# EAGLE board ventmon_t0.5 (EAGLE 9.6.2)
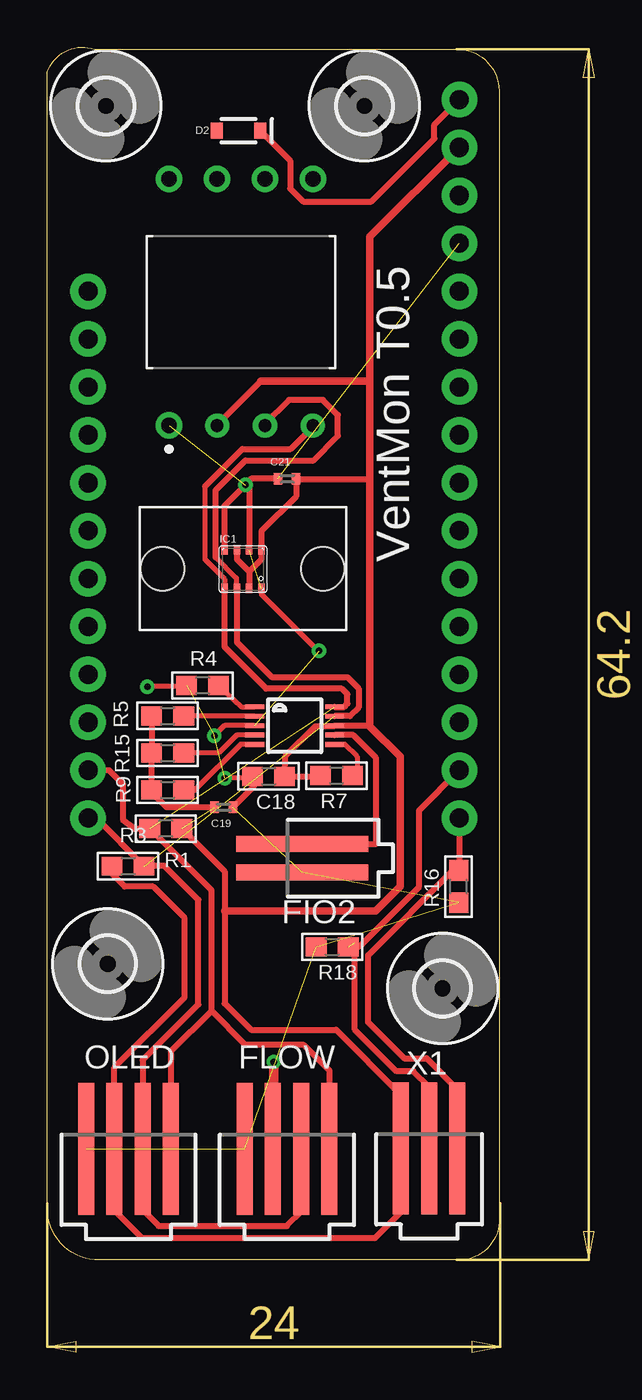
[diagram p0: board, top side]
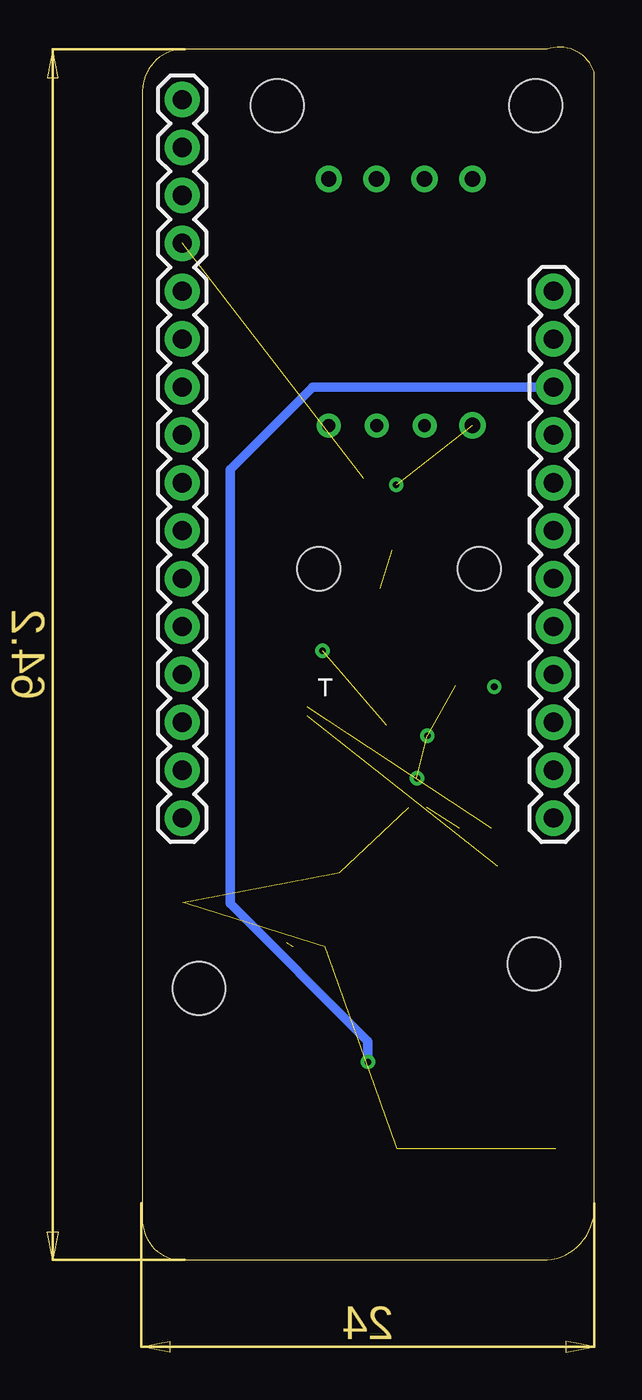
[diagram p1: board, bottom side, seen from below]

Size 23.96 x 64.31 mm. Coordinates in mm from the lower left corner, seen from the top.
Outline: 0.01,3 0.01,63 arc-90 2.51,64.2 21.71,64.2 arc-90 23.96,62 23.96,2 arc-90 21.71,0 2.51,0 arc-90 0.01,3
Copper layers (1*16): Top 0.035mm / dielectric 1.5mm / Bottom 0.035mm
Design rules "default *": minimum track width 6mil, minimum drill 10mil, track to track 6mil, track to pad 6mil, pad to pad 6mil, via to via 6mil, smd to smd 6mil, copper to edge 40mil, drill to drill 6mil, minimum pad ring 10mil, minimum via ring 8mil, stop-mask expansion 4mil, vias tented up to drill 0.35mm, thermal gap 10mil

## Footprints (pad centres in the part's own frame; a part is rotated, then mirrored left to right if it is on the bottom)
0603 = smd 1.1 x 1: 1 -0.85,0; 2 0.85,0
C0402_B = smd 0.457 x 0.61: 1 -0.483,0; 2 0.483,0
SOD-323 = smd 0.63 x 0.83: A 1.15,0; C -1.15,0
87438-02 = smd 7 x 0.85: 1 0,0.75; 2 0,-0.75
87438-04 = smd 7 x 0.85: 1 0,2.25; 2 0,0.75; 3 0,-0.75; 4 0,-2.25
2,8 = hole 2.8: 0,0
BME280-HAT = smd 0.35 x 0.5: 1 2.245,-2.295; 2 1.595,-2.295; 3 0.945,-2.295; 4 0.295,-2.295; 5 0.295,-0.245; 6 0.945,-0.245; 7 1.595,-0.245; 8 2.245,-0.245 | hole 2.3: 5.5,-1.25; -3,-1.25
1X16 = drill 1.016 pad 1.88: 1 0,0; 2 2.54,0; 3 5.08,0; 4 7.62,0; 5 10.16,0; 6 12.7,0; 7 15.24,0; 8 17.78,0; 9 20.32,0; 10 22.86,0; 11 25.4,0; 12 27.94,0; 13 30.48,0; 14 33.02,0; 15 35.56,0; 16 38.1,0
1X12 = drill 1.016 pad 1.88: 1 0,0; 2 2.54,0; 3 5.08,0; 4 7.62,0; 5 10.16,0; 6 12.7,0; 7 15.24,0; 8 17.78,0; 9 20.32,0; 10 22.86,0; 11 25.4,0; 12 27.94,0
DIP1330W46P254L1000H616Q8B = drill 0.813 pad 1.397: 1 -6.54,3.81; 5 6.54,-3.81; 6 6.54,-1.27; 7 6.54,1.27; 8 6.54,3.81 | drill 0.675 pad 1.275: 2 -6.54,1.27; 3 -6.54,-1.27; 4 -6.54,-3.81
MSOP10 = smd 0.25 x 1: 1 -1,-2.113; 2 -0.5,-2.113; 3 0,-2.113; 4 0.5,-2.113; 5 1,-2.113; 6 1,2.113; 7 0.5,2.113; 8 0,2.113; 9 -0.5,2.113; 10 -1,2.113
87438-03 = smd 7 x 0.85: 1 0,1.5; 2 0,0; 3 0,-1.5

## Placement (x,y rotation side)
C18  1µF  [0603]  11.74,25.65 0 top
C19  0.1uF  [C0402_B]  9.36,24 180 top
C21  0.1uF  [C0402_B]  12.71,41.42 0 top
D2  250mA/100V  [SOD-323]  10.15,59.88 180 top
FIO2  87438-02  [87438-02]  13.51,21.3 180 top
FLOW  87438-04  [87438-04]  12.71,5.9 90 top
H1  MOUNT-HOLE2.8  [2,8]  16.81,61.2 0 top
H2  MOUNT-HOLE2.8  [2,8]  20.96,14.4 0 top
H3  MOUNT-HOLE2.8  [2,8]  3.21,15.7 0 top
H4  MOUNT-HOLE2.8  [2,8]  3.11,61.2 0 top
IC1  BME280BM280-HAT  [BME280-HAT]  9.11,37.9 0 top
J6  Header-16  [1X16]  21.85,61.53 270 bottom
J7  Header-12  [1X12]  2.17,51.37 270 bottom
OLED  87438-04  [87438-04]  4.31,5.9 90 top
PRESSURE1  HSCDRRT001PD2A3  [DIP1330W46P254L1000H616Q8B]  10.28,50.79 90 top
R1  4.7K  [0603]  6.29,22.88 180 top
R3  4.7K  [0603]  4.29,20.88 0 top
R4  10K  [0603]  8.24,30.46 180 top
R5  10K  [0603]  6.39,28.85 0 top
R7  10K  [0603]  15.34,25.69 0 top
R9  10K  [0603]  6.39,24.92 0 top
R15  10K  [0603]  6.39,26.89 0 top
R16  10K  [0603]  21.81,19.8 90 top
R18  10K  [0603]  15.11,16.6 0 top
U2  ADS1115IDGST  [MSOP10]  13.12,28.34 270 top
X1  87438-03  [87438-03]  20.25,5.93 90 top

## Library data of the parts
C18 R1 R3-R5 R7 R9 R15 R16 R18 U2 = microbuilder
C19 C21 = Particle
D2 = SparkFun-DiscreteSemi; PROD_ID: DIO-09646
FIO2 = con-molex; MF: MOLEX; OC_FARNELL: 1711327; OC_NEWARK: unknown
FLOW OLED = con-molex; MF: MOLEX; OC_FARNELL: unknown; OC_NEWARK: unknown
H1 = holes; SPICEPREFIX: X
H2-H4 = holes
IC1 = bosch-bme280
J6 J7 = SparkFun-Connectors
PRESSURE1 = HSCDRRT001PD2A3
X1 = con-molex; MF: MOLEX; OC_FARNELL: 1711328; OC_NEWARK: unknown

## Nets
!RESET: D2.A
+3V3: C18.2 C19.2 C21.2 IC1.2 IC1.6 IC1.8 J6.2 OLED.2 PRESSURE1.2 R1.1 R3.1 R5.1 R7.1 R9.1 R15.1 U2.8 X1.1
+5V: FLOW.2 J7.3
ADDR: R4.1 U2.1
ALERT: R5.2 U2.2
BTNA: J6.16 R16.2 X1.3
BTNB: J6.15 R18.2 X1.2
FIO2: FIO2.2 U2.7
GND: C18.1 C19.1 C21.1 FIO2.1 FLOW.1 IC1.1 IC1.5 IC1.7 J6.4 OLED.1 PRESSURE1.1 R4.2 R16.1 R18.1 U2.3
MISO: J6.13
MOSI: J6.12
N$4: D2.C J6.1
N$24: J7.7
N$25: J7.8
N$26: J7.9
N$38: R7.2 U2.6
N$40: R9.2 U2.5
N$45: R15.2 U2.4
SCL: FLOW.4 IC1.4 J7.11 OLED.4 PRESSURE1.4 R1.2 U2.10
SCLK: J6.11
SDA: FLOW.3 IC1.3 J7.12 OLED.3 PRESSURE1.3 R3.2 U2.9

## Tracks (layer width: path | path; a pad name or v marks a point on that pad's centre or on a via)
+3V3  (1 unrouted)
  Top 0.2: 10.71,36.5
  Top 0.305: IC1.6 10.06,37.16 10.71,36.5 11.36,37.15 IC1.8 11.36,38.65 13.19,40.48 C21.2 | 10.71,36.5 IC1.2 10.71,35.66 | R7.1 14.46,25.65 C18.2 12.63,26.72 14.21,28.3 15.2,28.3 U2.8 17.11,28.34 | 5.44,24.98 5.51,24.95 R9.1 | X1.1 18.75,2.54 17.38,1.17 5.01,1.17 3.56,2.62 OLED.2 3.56,10.2 7.29,13.93 7.29,18.13 5.61,19.8 4.11,19.8 3.44,20.48 R3.1 | X1.1 18.75,9.23 | X1.1 18.75,8.77 15.31,12.2 10.81,12.2 9.41,13.6 9.41,18.5 9.41,20.6 R1.1 6.94,23.18 | 13.19,41.52 C21.2 | C21.2 13.21,41.4 17.11,41.4 | 11.31,46.6 9.01,44.3 PRESSURE1.2 | R9.1 5.61,24.85 | R9.1 R15.1 R5.1 | R9.1 5.54,24.8 6.34,24 C19.2
  Top 0.406: 5.23,24.92 R9.1 | 9.41,18.5 17.41,18.5 18.71,19.8 18.71,26.7 17.11,28.3 17.11,28.34 17.11,41.4 17.11,46.6 | J6.2 17.11,54.25 17.11,46.6 | 11.31,46.6 17.11,46.6
+5V  (via drill 0.35)
  Top 0.508: v12.01,10.5 12.01,5.95 FLOW.2
  Bottom 0.508: J7.3 14.92,46.29 19.31,41.9 19.31,18.9 12.01,11.6 v12.01,10.5 12.01,10.4
ADDR
  Top 0.254: R4.1 10.31,29.34 U2.1
ALERT
  Top 0.254: U2.2 7.32,28.84 R5.2
BTNA
  Top 0.305: X1.3 21.75,9.06 20.11,10.69 18.92,10.69 17.01,12.6 17.01,16.15 21.51,20.65 R16.2 21.85,20.69 J6.16
BTNB  (1 unrouted)
  Top 0.305: X1.2 20.25,9.17 19.41,10 18.51,10 16.31,12.2 16.31,16.6 R18.2 16.53,16.6 19.71,19.78 19.71,23.83 J6.15 | 16.31,16.8 16.21,16.9
FIO2
  Top 0.305: FIO2.2 17.41,22.05 17.41,26.65 16.23,27.84 U2.7
GND  (via drill 0.35)  (11 unrouted)
  Top 0.254: 10.81,41.42 10.81,41.4 v10.51,41.1 10.71,41.3 | IC1.1 11.36,35.31 14.36,32.3 v14.41,32.3 | R4.2 7.23,30.4 v5.31,30.4 | C18.1 10.88,25.55 v9.41,25.55 | U2.3 9.4,28.34 v8.86,27.8
  Top 0.305: C21.1 10.81,41.42 | 10.71,41.3 IC1.7 | IC1.5 9.41,40 v10.51,41.1 | C18.1 10.94,25.7 10.94,25.1 C19.1
MISO
  Top 0.203: 21.75,31.15 J6.13
N$4
  Top 0.305: J6.1 20.52,60.2 20.52,59.47 17.18,56.13 13.57,56.13 12.88,56.82 12.88,58.29 D2.C
N$38
  Top 0.254: U2.6 15.78,27.34 16.43,26.69 16.43,25.9 R7.2
N$40
  Top 0.254: U2.5 10.25,27.34 7.84,24.92 R9.2
N$45
  Top 0.254: R15.2 9.1,26.89 10.05,27.84 U2.4
SCL  (1 unrouted)
  Top 0.254: IC1.4 9.41,36.11 8.38,37.14 8.38,41.04
  Top 0.305: FLOW.4 14.96,10.05 13.61,11.4 10.51,11.4 8.71,13.2 | J7.11 3.27,25.97 4.01,25.23 4.01,23.34 4.61,22.88 R1.2 8.71,19.6 8.71,13.2 | U2.10 15.75,29.34 15.91,29.5 15.91,30 15.61,30.3 11.61,30.3 9.41,32.51 IC1.4 | 8.38,41.04 10.34,43 12.91,43 14.09,44.18 PRESSURE1.4 | 8.71,13.2 6.56,11.05 OLED.4
  Bottom 0.152: J7.11
SDA  (1 unrouted)
  Top 0.2: 10.03,35.63 IC1.3 | 5.01,4.6 5.01,4.8 5.06,4.85 5.06,5.4
  Top 0.254: 10.03,35.63 10.03,36.16 8.93,37.27
  Top 0.305: OLED.3 5.06,5.4 | FLOW.3 13.51,5.85 13.51,2.6 12.71,1.8 5.91,1.8 5.11,2.6 5.11,5.85 OLED.3 | 8.93,37.27 8.93,37.28 8.93,40.82 10.51,42.4 14.11,42.4 15.41,43.7 15.41,44.8 14.61,45.6 12.81,45.6 11.55,44.34 PRESSURE1.3 | IC1.3 10.06,32.76 11.91,30.9 15.91,30.9 16.51,30.3 16.51,29.3 16.05,28.84 U2.9 | R3.2 2.61,23.43 J7.12 | R3.2 4.92,21 | OLED.3 5.06,10.6 8.01,13.55 8.01,19.1 6.21,20.9 5.16,20.9 R3.2

## Text on the board
tPlace: VentMon T0.5
bPlace: VentMon T0.5 | Public Invention